# Altium PCB VESC_JLC.PcbDoc (part 1 of 3)
Units mm, origin at the board's own origin, x right, y up, seen from the top; angles counter-clockwise.
Board outline 74.1 x 118 mm, 2 copper layers (Component Side, Bottom Layer), stack 1.571 mm thick; 178 components, 173 nets, 901 pads, 567 vias.
Unrouted connection lines stored in the file: 10.
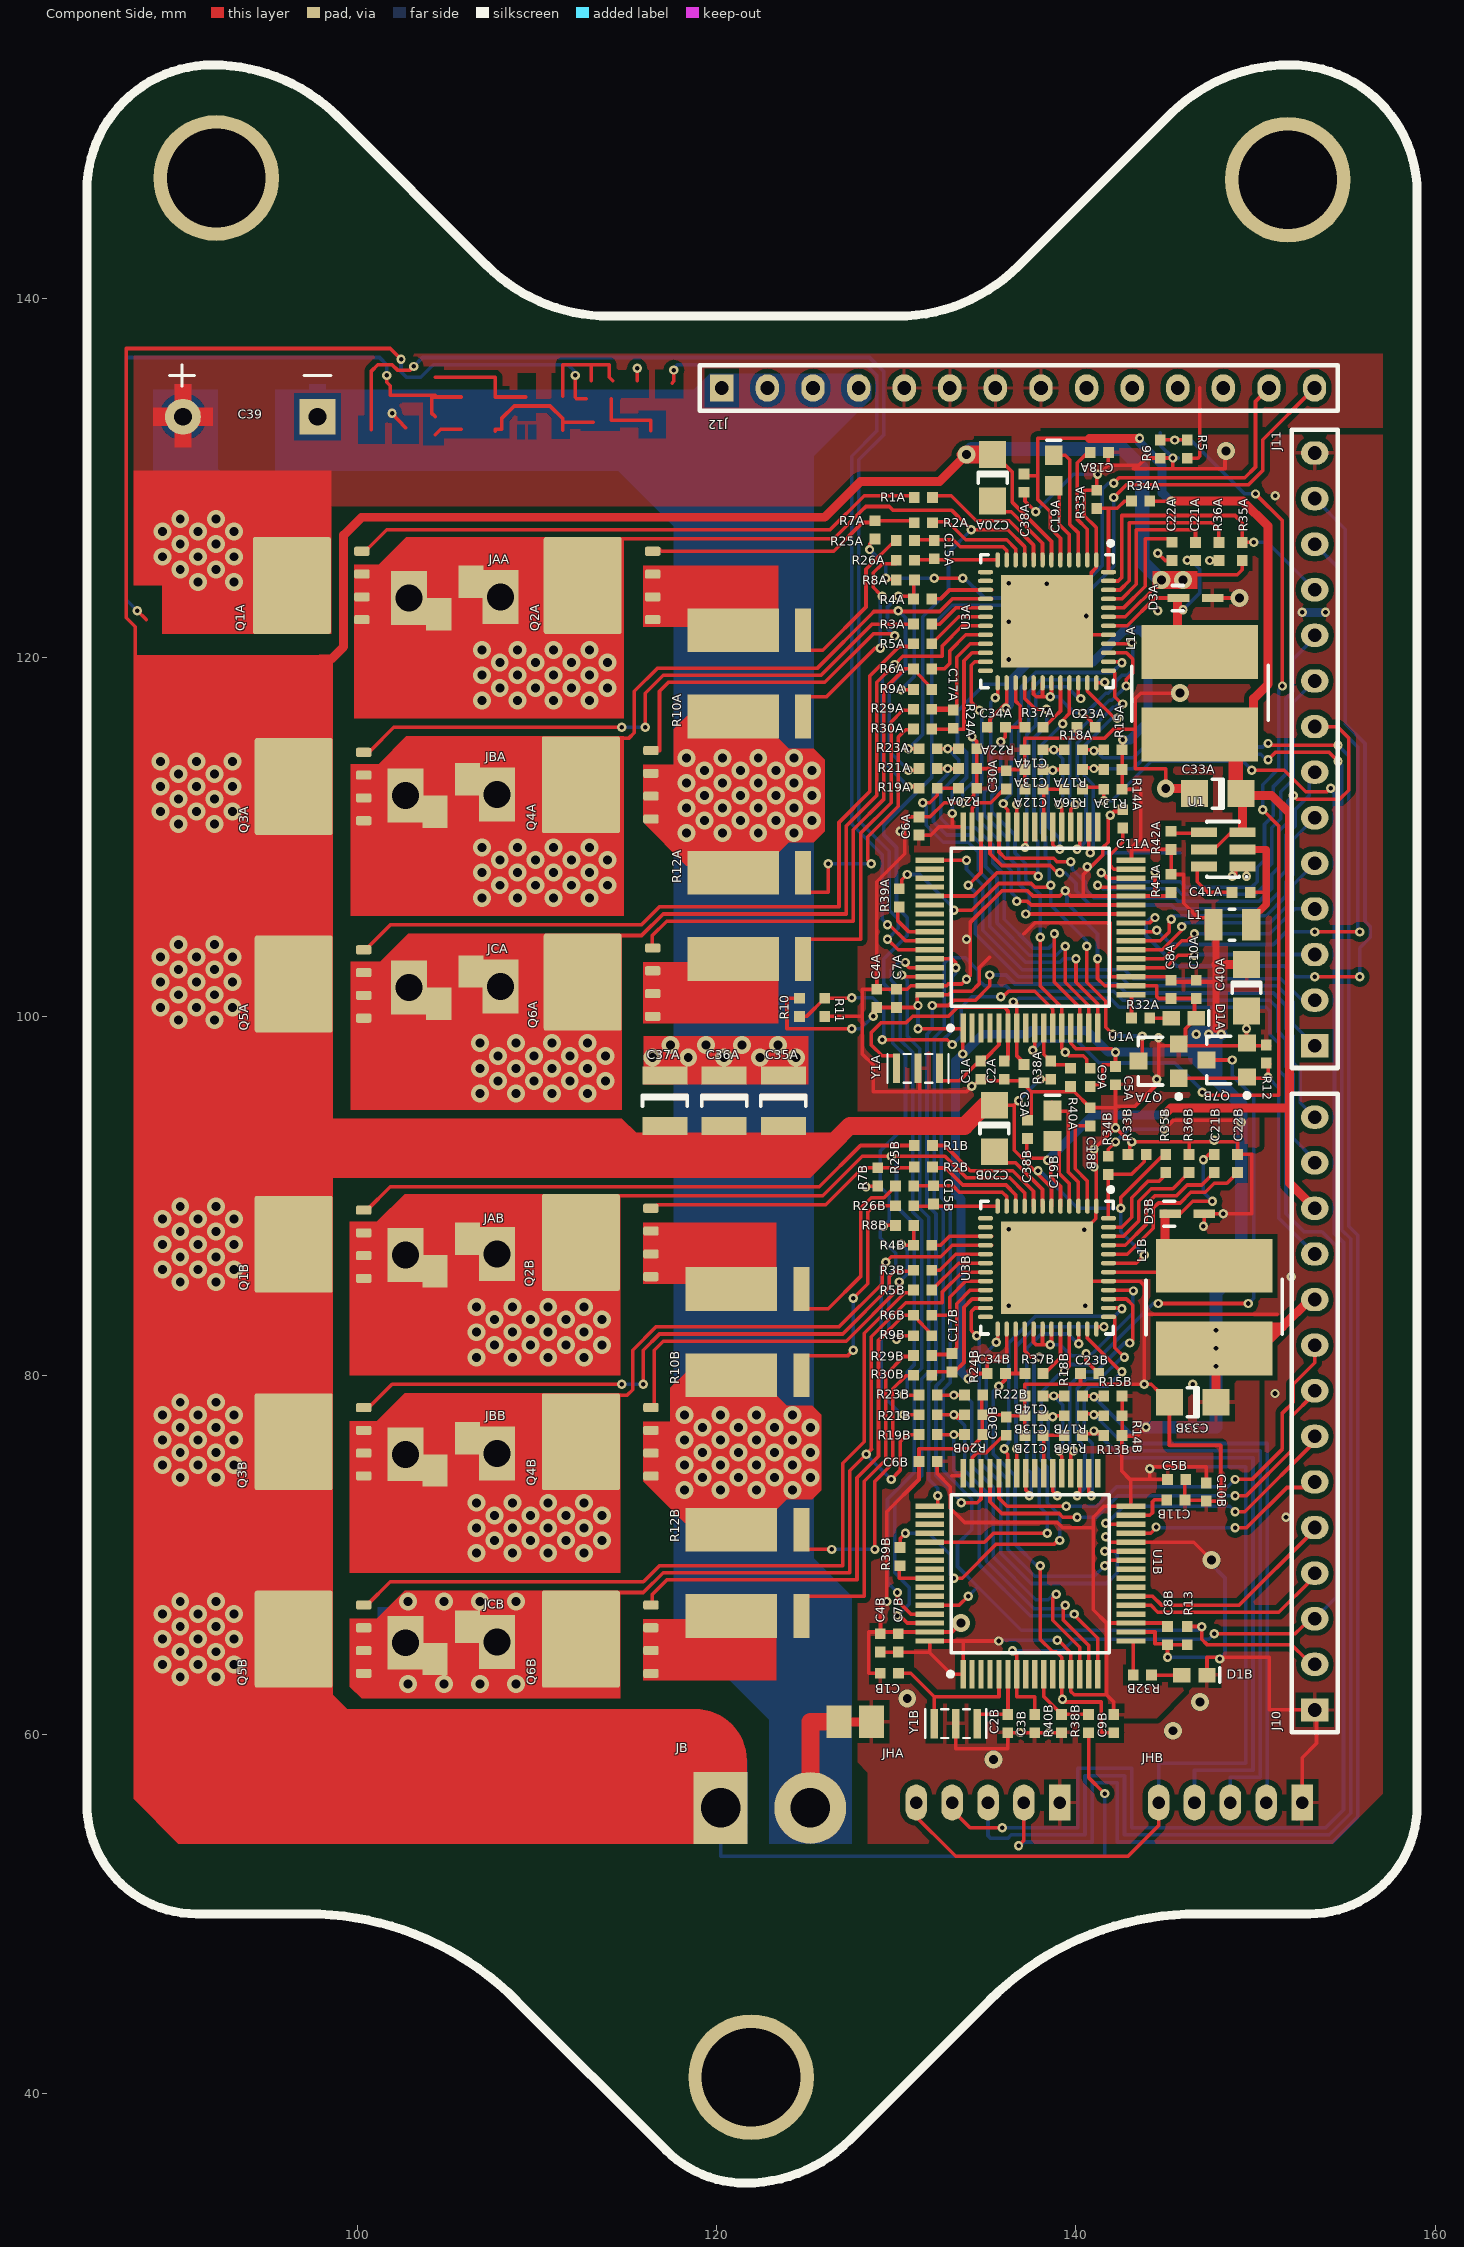
[diagram p0: Component Side view]
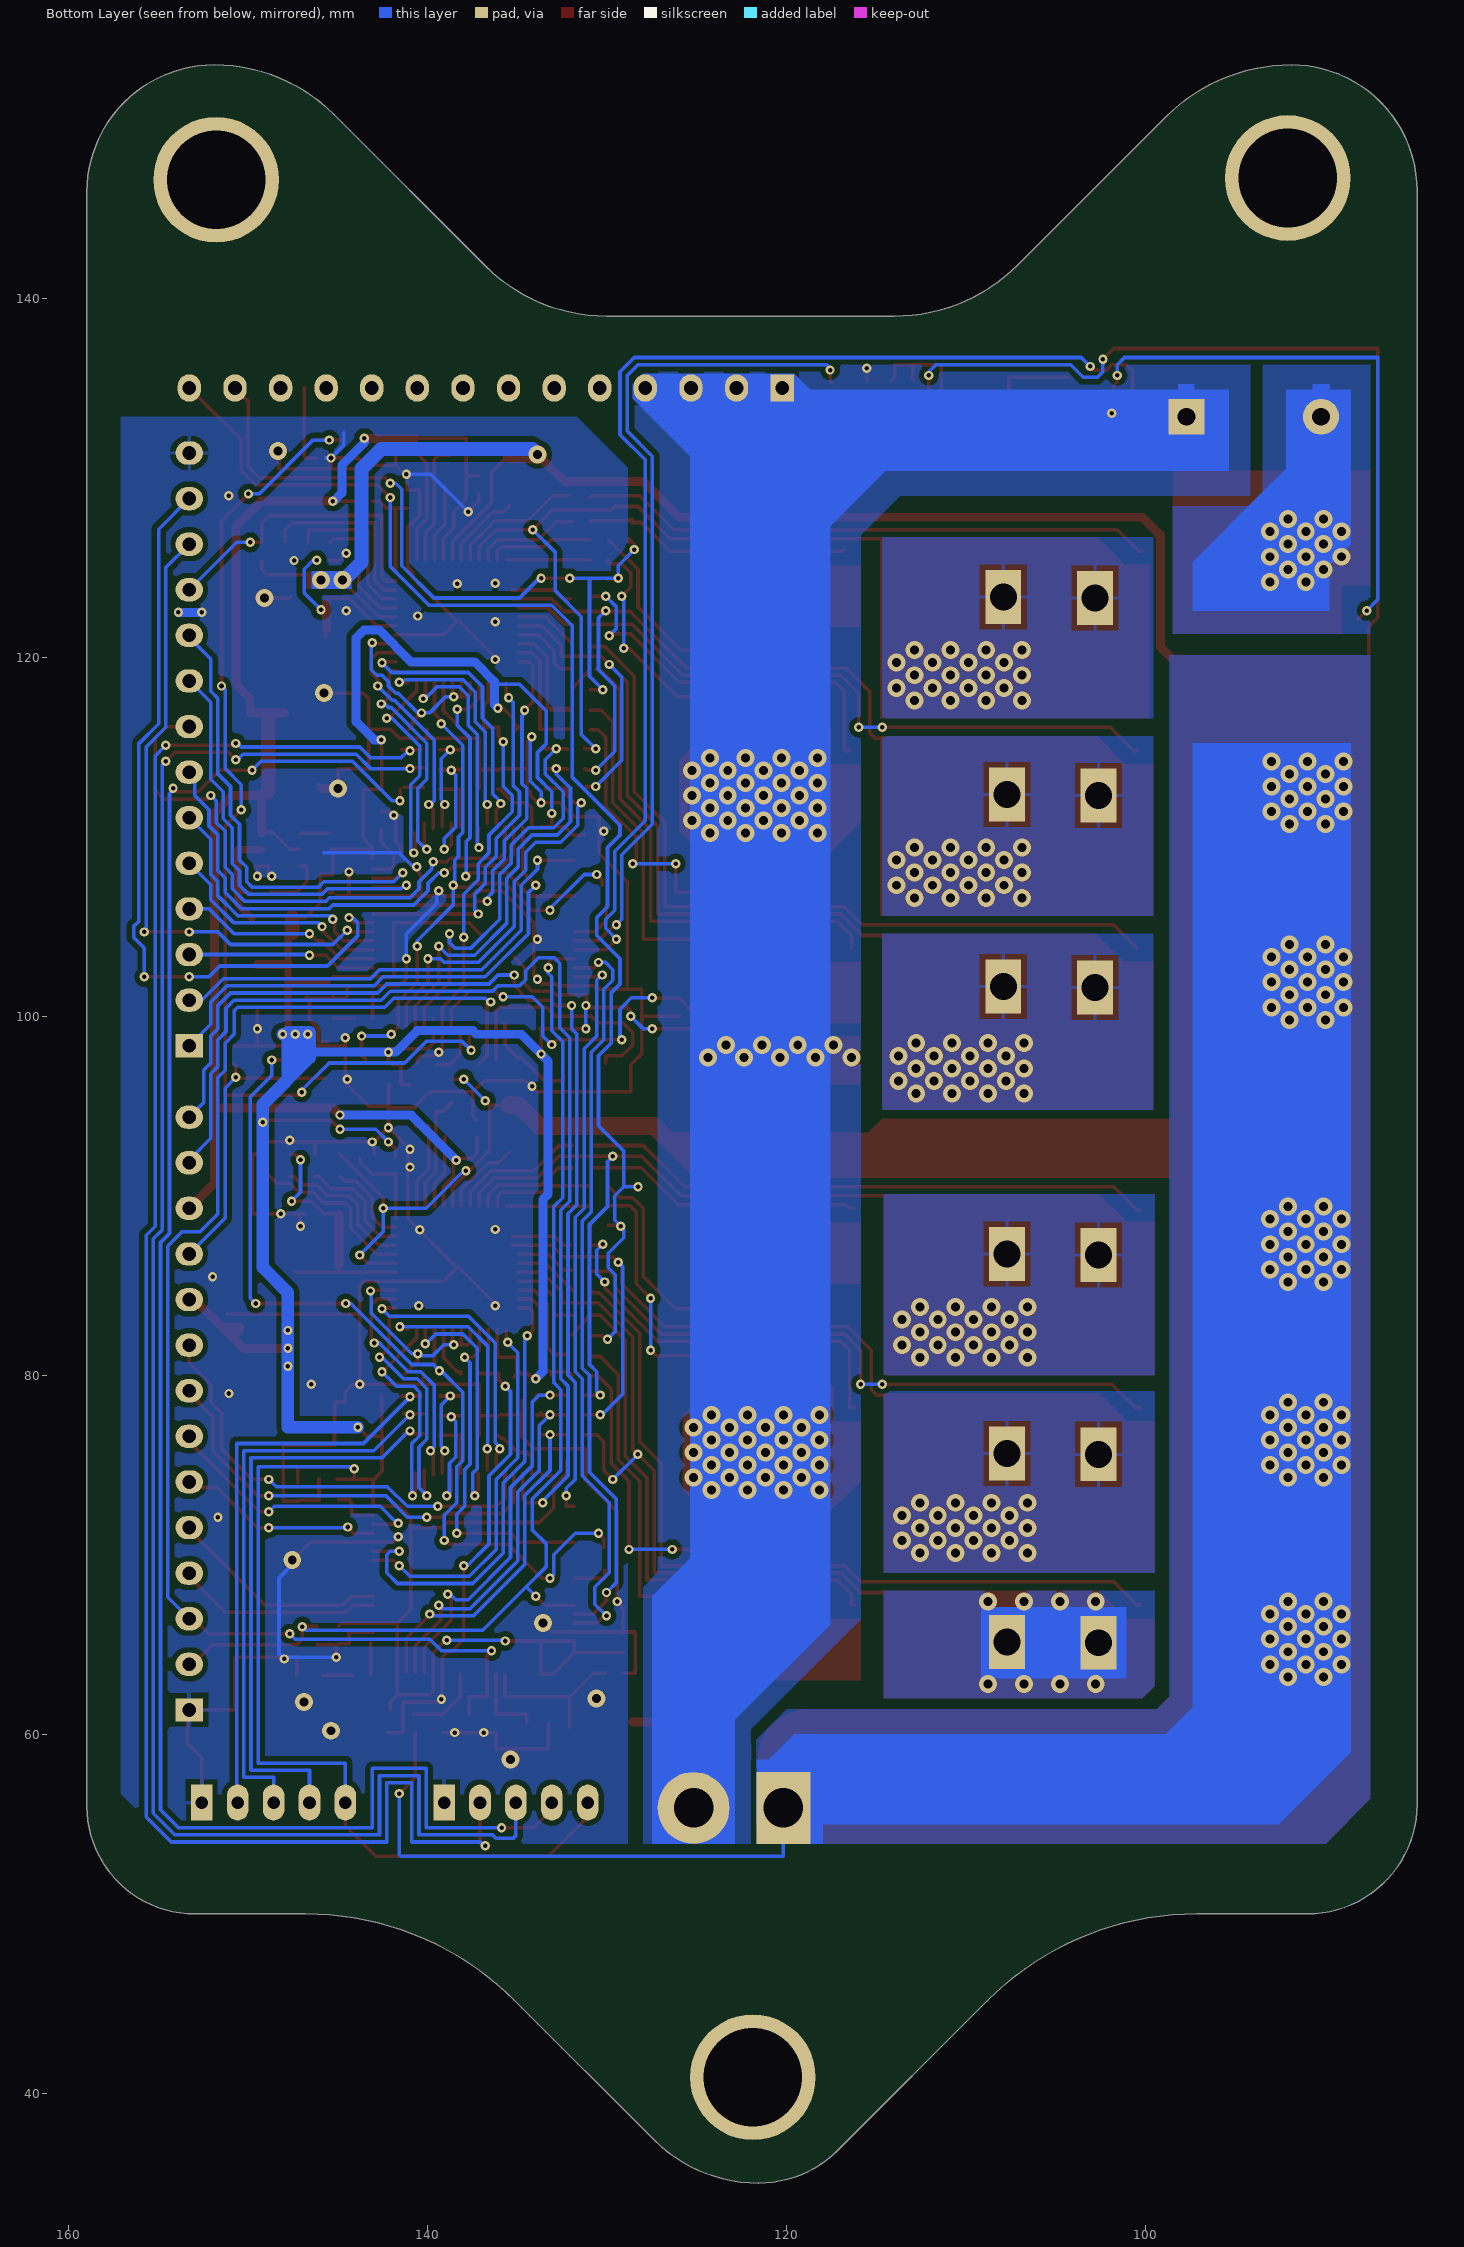
[diagram p1: Bottom Layer view, seen from below]

## Layer stack, top to bottom
Top Solder: solder mask 0.0102, Solder Resist, Dk 3.5
Component Side: signal copper 0.0356
Dielectric 1: core 1.5, FR-4, Dk 4.2
Bottom Layer: signal copper 0.0356
Solder Side: solder mask 0.0102, Solder Resist, Dk 3.5

## Board outline
159,56 159,145.9 ccw(c151.9,145.9) 151.9,153 ccw(c151.9,143.585) 145.242,150.242 136.809,141.809 cw(c130.027,148.591) 130.027,139 114.031,139 cw(c114.031,148.733) 107.149,141.851 98.899,150.101 ccw(c91.9,143.103) 91.9,153 ccw(c91.9,146) 84.9,146 84.9,56.1 ccw(c91,56.1) 91,50 97.172,50 cw(c97.172,33.516) 108.828,45.172 117.172,36.828 ccw(c121.586,41.243) 121.586,35 ccw(c121.586,43.243) 127.414,37.414 135.172,45.172 cw(c146.828,33.515) 146.828,50 153,50 ccw(c153,56)

## Design rules (kind name [scope] priority, off if disabled: settings)
Clearance Clearance_Poly [InPolygon And Not IsPad] p1: gap=0.3 ignorepadtopadclearanceinfootprint=FALSE except(0: Arc-Hole Track-Hole SMDPad-Hole THPad-Hole Via-Hole Fill-Hole Poly-Hole Region-Hole Text-Hole)
Clearance [All] p2: gap=0.152 ignorepadtopadclearanceinfootprint=FALSE except(0: Arc-Hole Track-Hole SMDPad-Hole THPad-Hole Via-Hole Fill-Hole Poly-Hole Region-Hole Text-Hole)
DiffPairsRouting [All] p1: maxlimit=0.305 minlimit=0.152 mostfreqgap=0.152 toplayer_minwidth=0.076 toplayer_maxwidth=0.305 toplayer_prefwidth=0.152 bottomlayer_minwidth=0.076 bottomlayer_maxwidth=0.305 bottomlayer_prefwidth=0.152 maxuncoupledlength=12.7
HoleSize [All] p1: absolutevalues=TRUE maxlimit=10 minlimit=0.025 maxpercent=80.000 minpercent=20.000
MatchedLengths USBC_ADAPTER_USB2 [InDifferentialPair('USBC_D')] p1: tolerance=1.5 checknetsindiffpair=FALSE checkdiffpairvsdiffpair=TRUE checkxsignals=TRUE checkothers=TRUE
MatchedLengths USBC_ADAPTER_DP [InNetClass('SMALL_SIGNAL_DP')] p2: tolerance=1.5 checknetsindiffpair=FALSE checkdiffpairvsdiffpair=TRUE checkxsignals=TRUE checkothers=TRUE
MatchedLengths USBC_ADAPTER_USB3 [InNetClass('SMALL_SIGNAL_USBC')] p3: tolerance=1.5 checknetsindiffpair=FALSE checkdiffpairvsdiffpair=TRUE checkxsignals=TRUE checkothers=TRUE
MatchedLengths FLEX_ADAPTER_MIPI_A [InNetClass('SMALL_SIGNAL_MIPI_A')] p4: tolerance=0.508 checknetsindiffpair=FALSE checkdiffpairvsdiffpair=TRUE checkxsignals=TRUE checkothers=TRUE
MatchedLengths FLEX_ADAPTER_MIPI_B [InNetClass('SMALL_SIGNAL_MIPI_B')] p5: tolerance=0.508 checknetsindiffpair=FALSE checkdiffpairvsdiffpair=TRUE checkxsignals=TRUE checkothers=TRUE
MatchedLengths FLEX_ADAPTER_MIPI_C [InNetClass('SMALL_SIGNAL_MIPI_C')] p6: tolerance=0.508 checknetsindiffpair=FALSE checkdiffpairvsdiffpair=TRUE checkxsignals=TRUE checkothers=TRUE
MatchedLengths DISPLAY_BOARD_USB2_AUD [InNetClass('SMALL_SIGNAL_USB2_AUD')] p7: tolerance=1.27 checknetsindiffpair=FALSE checkdiffpairvsdiffpair=TRUE checkxsignals=TRUE checkothers=TRUE
MatchedLengths DISPLAY_BOARD_USB2_MCU [InNetClass('SMALL_SIGNAL_USB2_MCU')] p8: tolerance=1.27 checknetsindiffpair=FALSE checkdiffpairvsdiffpair=TRUE checkxsignals=TRUE checkothers=TRUE
MatchedLengths DISPLAY_BOARD_USB2_PORT1 [InNetClass('SMALL_SIGNAL_USB2_PORT1')] p9: tolerance=1.27 checknetsindiffpair=FALSE checkdiffpairvsdiffpair=TRUE checkxsignals=TRUE checkothers=TRUE
MatchedLengths DISPLAY_BOARD_USB2_PORT2 [InNetClass('SMALL_SIGNAL_USB2_PORT2')] p10: tolerance=1.27 checknetsindiffpair=FALSE checkdiffpairvsdiffpair=TRUE checkxsignals=TRUE checkothers=TRUE
MatchedLengths DISPLAY_BOARD_MIPI_11 [InNetClass('SMALL_SIGNAL_MIPI11')] p11: tolerance=1.27 checknetsindiffpair=FALSE checkdiffpairvsdiffpair=TRUE checkxsignals=TRUE checkothers=TRUE
MatchedLengths DISPLAY_BOARD_MIPI_00 [InNetClass('SMALL_SIGNAL_MIPI00')] p12: tolerance=1.27 checknetsindiffpair=FALSE checkdiffpairvsdiffpair=TRUE checkxsignals=TRUE checkothers=TRUE
MatchedLengths DISPLAY_BOARD_MIPI_01 [InNetClass('SMALL_SIGNAL_MIPI01')] p13: tolerance=1.27 checknetsindiffpair=FALSE checkdiffpairvsdiffpair=TRUE checkxsignals=TRUE checkothers=TRUE
MatchedLengths DISPLAY_BOARD_MIPI_10 [InNetClass('SMALL_SIGNAL_MIPI10')] p14: tolerance=1.27 checknetsindiffpair=FALSE checkdiffpairvsdiffpair=TRUE checkxsignals=TRUE checkothers=TRUE
MatchedLengths DISPLAY_BOARD_USB2_UP [InNetClass('SMALL_SIGNAL_USB2_UP')] p15: tolerance=1.27 checknetsindiffpair=FALSE checkdiffpairvsdiffpair=TRUE checkxsignals=TRUE checkothers=TRUE
MinimumSolderMaskSliver [All] p1: minsoldermaskwidth=0.051
NetAntennae [All] p1 off: netantennaetolerance=0
PolygonConnect [Not IsVia vs Not IsVia] p1: connectstyle=Relief reliefconductorwidth=0.2 reliefentries=4 polygonreliefangle="90 Angle" airgapwidth=0.3
PolygonConnect PolygonConnect_Via [IsVia vs IsVia] p2: connectstyle=Direct reliefconductorwidth=0.254 reliefentries=4 polygonreliefangle="90 Angle" airgapwidth=0.152
RoutingCorners [All] p1: cornerstyle=Round minsetback=2.54 maxsetback=2.54
RoutingVias [All] p1: holewidth=0.152 width=0.279 viastyle="Through Hole" minholewidth=0.152 minwidth=0.279 maxholewidth=0.305 maxwidth=0.61
ShortCircuit [Not IsPad vs Not IsPad] p1: allowed=TRUE
SilkToSilkClearance [All] p1 off: silktosilkclearance=0.102
SilkToSolderMaskClearance [IsPad] p1 off: minsilkscreentomaskgap=0.102 clearancetoexposedcopper=TRUE
SolderMaskExpansion [All] p1: expansion=0.051
Width [All] p1: maxlimit=2.54 minlimit=0.127 preferedwidth=0.152
22 further rules are at their usual default settings.

## Components (designator, comment, footprint, x,y, rotation, side; value= is the part's Value field where it differs from the comment)
C1A "GCM1555C1H180JA16D" "CAP 0402" 134.7,97 r270 top value=18pF
C1B "GCM1555C1H180JA16D" "CAP 0402" 129.6,63.4 r180 top value=18pF
C2A "GCM1555C1H180JA16D" "CAP 0402" 136,97 r270 top value=18pF
C2B "GCM1555C1H180JA16D" "CAP 0402" 136.2,60.6 r270 top value=18pF
C3A "GCM155R71E103JA37D" "CAP 0402" 137.1,96.8 r270 top value=10nF
C3B "C0402C104K3RACTU" "CAP 0402" 137.7,60.6 r270 top value=100nF
C4A "GRM155C81C225ME15D" "CAP 0402" 128.9,101 r90 top value=2.2uF
C4B "GRM155C81C225ME15D" "CAP 0402" 129.1,65.092 r90 top value=2.2uF
C5A "GRM155C81C225ME15D" "CAP 0402" 142.2,96.7 r270 top value=2.2uF
C5B "GRM155C81C225ME15D" "CAP 0402" 145.6,74.2 r0 top value=2.2uF
C6A "GRM155C81C225ME15D" "CAP 0402" 131.26,110.6 r90 top value=2.2uF
C6B "GRM155C81C225ME15D" "CAP 0402" 131.76,75.2 r180 top value=2.2uF
C7A "GRM155C81C225ME15D" "CAP 0402" 130,101 r90 top value=2.2uF
C7B "GRM155C81C225ME15D" "CAP 0402" 130.1,65.092 r90 top value=2.2uF
C8A "GRM155C81C225ME15D" "CAP 0402" 145.3,101.5 r270 top value=2.2uF
C8B "GRM155C81C225ME15D" "CAP 0402" 145.1,65.5 r270 top value=2.2uF
C9A "GRM155C81C225ME15D" "CAP 0402" 140.8,96.6 r90 top value=2.2uF
C9B "GRM155C81C225ME15D" "CAP 0402" 142.1,60.6 r270 top value=2.2uF
C10A "GRM155C81C225ME15D" "CAP 0402" 146.7,101.5 r270 top value=2.2uF
C10B "GRM155C81C225ME15D" "CAP 0402" 147.26,73.5 r270 top value=2.2uF
C11A "GRM155C81C225ME15D" "CAP 0402" 142.6,111 r90 top value=2.2uF
C11B "GRM155C81C225ME15D" "CAP 0402" 145.56,73.05 r0 top value=2.2uF
C12A "GCM155R72A222KA37D" "CAP 0402" 137.66,112.65 r0 top value=2.2nF
C12B "GCM155R72A222KA37D" "CAP 0402" 137.66,76.65 r0 top value=2.2nF
C13A "GCM155R72A222KA37D" "CAP 0402" 137.66,113.75 r0 top value=2.2nF
C13B "GCM155R72A222KA37D" "CAP 0402" 137.66,77.75 r0 top value=2.2nF
C14A "GCM155R72A222KA37D" "CAP 0402" 137.66,114.85 r0 top value=2.2nF
C14B "GCM155R72A222KA37D" "CAP 0402" 137.66,78.85 r0 top value=2.2nF
C15A "GCM155R72A222KA37D" "CAP 0402" 132.1,126 r90 top value=2.2nF
C15B "GCM155R72A222KA37D" "CAP 0402" 132.06,90.05 r90 top value=2.2nF
C17A "GCM155R72A222KA37D" "CAP 0402" 133.168,116.55 r90 top value=2.2nF
C17B "GCM155R72A222KA37D" "CAP 0402" 133.1,80.7 r90 top value=2.2nF
C18A "GRM155C81C225ME15D" "CAP 0402" 141.3,131.4 r0 top value=2.2uF
C18B "GRM155C81C225ME15D" "CAP 0402" 140.8,94.4 r90 top value=2.2uF
C19A "C0603C473K1RECAUTO" "CAP 0603" 138.76,130.4 r270 top value=47nF
C19B "C0603C473K1RECAUTO" "CAP 0603" 138.7,93.9 r270 top value=47nF
C20A "GRJ31CR72A105KE11L" "CAP 1206" 135.36,130 r270 top value=1uF
C20B "GRJ31CR72A105KE11L" "CAP 1206" 135.452,93.75 r270 top value=1uF
C21A "GCM155R71E103JA37D" "CAP 0402" 146.66,125.892 r270 top value=10nF
C21B "GCM155R71E103JA37D" "CAP 0402" 147.7,91.8 r90 top value=10nF
C22A "GRM155C81C225ME15D" "CAP 0402" 145.35,125.9 r90 top value=2.2uF
C22B "GRM155C81C225ME15D" "CAP 0402" 149,91.8 r270 top value=2.2uF
C23A "GRM155C81C225ME15D" "CAP 0402" 140.56,116.1 r0 top value=2.2uF
C23B "GRM155C81C225ME15D" "CAP 0402" 140.76,80.1 r0 top value=2.2uF
C30A "GRM155C81C225ME15D" "CAP 0402" 136.11,113.166 r90 top value=2.2uF
C30B "GRM155C81C225ME15D" "CAP 0402" 136.11,77.166 r90 top value=2.2uF
C33A "TMK316AB7106KL-T" "CAP 1206" 147.9,112.4 r180 top value=10uF
C33B "TMK316AB7106KL-T" "CAP 1206" 146.5,78.5 r180 top value=10uF
C34A "GRM155C81C225ME15D" "CAP 0402" 135.56,116.1 r0 top value=2.2uF
C34B "GRM155C81C225ME15D" "CAP 0402" 135.56,80.1 r0 top value=2.2uF
C35A "CGA6M3X7S2A475M200AB" "CAP 1210" 123.7,95.3 r270 top value=4.7uF
C36A "CGA6M3X7S2A475M200AB" "CAP 1210" 120.4,95.3 r270 top value=4.7uF
C37A "CGA6M3X7S2A475M200AB" "CAP 1210" 117.1,95.3 r270 top value=4.7uF
C38A "GRM155C81C225ME15D" "CAP 0402" 137.1,129.7 r270 top value=2.2uF
C38B "GRM155C81C225ME15D" "CAP 0402" 137.3,93.7 r90 top value=2.2uF
C39 "108CKS100MRY" "CAP 7.5mm Bent" 94,133.4 r180 top value=1000uF
C40A "TMK316AB7106KL-T" "CAP 1206" 149.5,101.6 r270 top value=10uF
C41A "C0402C104K3RACTU" "CAP 0402" 149.2,106.9 r180 top value=100nF
D1A "LTST-C190KRKT" "LED 0603" 146,99.9 r0 top
D1B "LTST-C190KRKT" "LED 0603" 146.6,63.3 r0 top
D3A "NSR02100HT1G" SOD-323/SC76 146.66,123.3 r180 top
D3B "NSR02100HT1G" SOD-323/SC76 146.2,89 r180 top
J10 "HEADER_14P1" HEADER_14P1_FEMALE_TH 153.3,77.9 r90 top
J11 "HEADER_14P1" HEADER_14P1_FEMALE_TH 153.3,114.9 r90 top
J12 "HEADER_14P1" HEADER_14P1_FEMALE_TH 136.81,135 r0 top
JAA "63849-1" 63849-1 105.4,123.3 r0 top
JAB "63849-1" 63849-1 105.2,86.7 r0 top
JB "XT30_S" "XT30 SOCKET" 122.7,55.6 r180 top
JBA "63849-1" 63849-1 105.2,112.3 r0 top
JBB "63849-1" 63849-1 105.2,75.6 r0 top
JCA "63849-1" 63849-1 105.4,101.6 r0 top
JCB "63849-1" 63849-1 105.2,65.1 r0 top
JHA "B05B-PASK" B05B-PASK 135.1,56.2 r180 top
JHB "B05B-PASK" B05B-PASK 148.6,56.2 r180 top
L1 "LQM2HPN4R7MG0L" "IND 1008" 148.7,105.1 r0 top value=4.7uH
L1A "SDE0805A-331K" SDE0805A 146.9,118 r270 top value=330uH
L1B "SDE0805A-331K" SDE0805A 147.7,83.8 r270 top value=330uH
Q1A "CSD19531Q5A" VSONP-8 97.4,124 r180 top value=100V
Q1B "CSD19531Q5A" VSONP-8 97.5,87.3 r180 top value=100V
Q2A "CSD19531Q5A" VSONP-8 113.6,124 r180 top value=100V
Q2B "CSD19531Q5A" VSONP-8 113.5,87.4 r180 top value=100V
Q3A "CSD19531Q5A" VSONP-8 97.5,112.8 r180 top value=100V
Q3B "CSD19531Q5A" VSONP-8 97.5,76.3 r180 top value=100V
Q4A "CSD19531Q5A" VSONP-8 113.5,112.9 r180 top value=100V
Q4B "CSD19531Q5A" VSONP-8 113.5,76.3 r180 top value=100V
Q5A "CSD19531Q5A" VSONP-8 97.5,101.8 r180 top value=100V
Q5B "CSD19531Q5A" VSONP-8 97.5,65.3 r180 top value=100V
Q6A "CSD19531Q5A" VSONP-8 113.6,101.9 r180 top value=100V
Q6B "CSD19531Q5A" VSONP-8 113.5,65.3 r180 top value=100V
Q7A "2N7002-7-F" SOT-23-3 144.6,97.5 r90 top
Q7B "2N7002-7-F" SOT-23-3 148.4,97.565 r90 top
R1A "ERJ-PA3J4R7V" "RES 0402" 131.5,128.9 r180 top value=4.7R
R1B "ERJ-PA3J4R7V" "RES 0402" 131.5,92.8 r180 top value=4.7R
R2A "ERJ-PA3J4R7V" "RES 0402" 131.5,127.5 r180 top value=4.7R
R2B "ERJ-PA3J4R7V" "RES 0402" 131.5,91.6 r180 top value=4.7R
R3A "ERJ-PA3J4R7V" "RES 0402" 131.46,121.85 r180 top value=4.7R
R3B "ERJ-PA3J4R7V" "RES 0402" 131.46,85.85 r180 top value=4.7R
R4A "ERJ-PA3J4R7V" "RES 0402" 131.46,123.25 r180 top value=4.7R
R4B "ERJ-PA3J4R7V" "RES 0402" 131.46,87.25 r180 top value=4.7R
R5 "ERJ-2RKF3902X" "RES 0402" 146.2,131.6 r270 top value=39k
R5A "ERJ-PA3J4R7V" "RES 0402" 131.46,120.75 r180 top value=4.7R
R5B "ERJ-PA3J4R7V" "RES 0402" 131.46,84.75 r180 top value=4.7R
R6 "ERJ-2RKF2201X" "RES 0402" 144.7,131.6 r90 top value=2.2k
R6A "ERJ-PA3J4R7V" "RES 0402" 131.46,119.35 r180 top value=4.7R
R6B "ERJ-PA3J4R7V" "RES 0402" 131.46,83.35 r180 top value=4.7R
R7A "ERJ-2RKF3902X" "RES 0402" 128.8,127.1 r90 top value=39k
R7B "ERJ-2RKF3902X" "RES 0402" 128.952,91.05 r90 top value=39k
R8A "ERJ-2RKF3902X" "RES 0402" 130.5,124.3 r0 top value=39k
R8B "ERJ-2RKF3902X" "RES 0402" 130.46,88.35 r0 top value=39k
R9A "ERJ-2RKF3902X" "RES 0402" 131.46,118.2 r0 top value=39k
R9B "ERJ-2RKF3902X" "RES 0402" 131.46,82.2 r0 top value=39k
R10 "ERT-J0EG202GM" "RES 0402" 124.6,100.5 r90 top value=2k
R10A "WSL27262L000FEB" WSL2726 121.8,119.1 r0 top value=1m
R10B "WSL27262L000FEB" WSL2726 121.7,82.4 r0 top value=1m
R11 "ERJ-2RKF2201X" "RES 0402" 126,100.5 r90 top value=2.2k
R12 "ERJ-2RKF2201X" "RES 0402" 150.6,97.9 r270 top value=2.2k
R12A "WSL27262L000FEB" WSL2726 121.8,105.6 r0 top value=1m
R12B "WSL27262L000FEB" WSL2726 121.7,69 r0 top value=1m
R13 "ERJ-2RKF1002X" "RES 0402" 146.2,65.5 r90 top value=10k
R13A "ERJ-2RKF2201X" "RES 0402" 142.06,112.65 r0 top value=2.2k
R13B "ERJ-2RKF2201X" "RES 0402" 142.06,76.65 r0 top value=2.2k
R14A "ERJ-2RKF2201X" "RES 0402" 142.06,113.75 r0 top value=2.2k
R14B "ERJ-2RKF2201X" "RES 0402" 142.06,77.75 r0 top value=2.2k
R15A "ERJ-2RKF2201X" "RES 0402" 142.06,114.85 r0 top value=2.2k
R15B "ERJ-2RKF2201X" "RES 0402" 142.06,78.85 r0 top value=2.2k
R16A "ERJ-2RKF1002X" "RES 0402" 139.86,112.65 r180 top value=10k
R16B "ERJ-2RKF1002X" "RES 0402" 139.86,76.65 r180 top value=10k
R17A "ERJ-2RKF1002X" "RES 0402" 139.86,113.75 r180 top value=10k
R17B "ERJ-2RKF1002X" "RES 0402" 139.86,77.75 r180 top value=10k
R18A "ERJ-2RKF1002X" "RES 0402" 139.86,114.85 r180 top value=10k
R18B "ERJ-2RKF1002X" "RES 0402" 139.86,78.85 r180 top value=10k
R19A "ERJ-2RKF3902X" "RES 0402" 131.76,112.7 r180 top value=39k
R19B "ERJ-2RKF3902X" "RES 0402" 131.76,76.7 r180 top value=39k
R20A "ERJ-2RKF2201X" "RES 0402" 133.96,112.7 r180 top value=2.2k
R20B "ERJ-2RKF2201X" "RES 0402" 134.3,76.7 r180 top value=2.2k
R21A "ERJ-2RKF3902X" "RES 0402" 131.76,113.8 r180 top value=39k
R21B "ERJ-2RKF3902X" "RES 0402" 131.76,77.8 r180 top value=39k
R22A "ERJ-2RKF2201X" "RES 0402" 133.96,113.8 r180 top value=2.2k
R22B "ERJ-2RKF2201X" "RES 0402" 134.3,77.8 r180 top value=2.2k
R23A "ERJ-2RKF3902X" "RES 0402" 131.76,114.9 r180 top value=39k
R23B "ERJ-2RKF3902X" "RES 0402" 131.76,78.9 r180 top value=39k
R24A "ERJ-2RKF2201X" "RES 0402" 133.96,114.9 r180 top value=2.2k
R24B "ERJ-2RKF2201X" "RES 0402" 134.3,78.9 r180 top value=2.2k
R25A "ERJ-2RKF1000X" "RES 0402" 130.5,126.5 r180 top value=100R
R25B "ERJ-2RKF1000X" "RES 0402" 130.46,90.55 r180 top value=100R
R26A "ERJ-2RKF1000X" "RES 0402" 130.5,125.4 r180 top value=100R
R26B "ERJ-2RKF1000X" "RES 0402" 130.46,89.45 r180 top value=100R
R29A "ERJ-2RKF1000X" "RES 0402" 131.46,117.1 r180 top value=100R
R29B "ERJ-2RKF1000X" "RES 0402" 131.46,81.1 r180 top value=100R
R30A "ERJ-2RKF1000X" "RES 0402" 131.46,116 r180 top value=100R
R30B "ERJ-2RKF1000X" "RES 0402" 131.46,80 r180 top value=100R
R32A "ERJ-2RKF1000X" "RES 0402" 143.6,99.9 r180 top value=100R
R32B "ERJ-2RKF1000X" "RES 0402" 143.7,63.3 r180 top value=100R
R33A "ERJ-2RKF3162X" "RES 0402" 141.16,128.8 r270 top value=31.6k
R33B "ERJ-2RKF3162X" "RES 0402" 143.4,92.3 r0 top value=31.6k
R34A "ERJ-2RKF1002X" "RES 0402" 143.6,128.7 r0 top value=10k
R34B "ERJ-2RKF1002X" "RES 0402" 141.8,91.7 r90 top value=10k
R35A "ERJ-2RKF2743X" "RES 0402" 149.26,125.892 r270 top value=274k
R35B "ERJ-2RKF2743X" "RES 0402" 145,91.8 r90 top value=274k
R36A "ERJ-2RKF1333X" "RES 0402" 147.96,125.892 r270 top value=133k
R36B "ERJ-2RKF1333X" "RES 0402" 146.3,91.8 r90 top value=133k
R37A "ERJ-2RKF4702X" "RES 0402" 137.66,116.1 r180 top value=47k
R37B "ERJ-2RKF4702X" "RES 0402" 137.66,80.1 r180 top value=47k
R38A "ERJ-2RKF3902X" "RES 0402" 138.6,97 r270 top value=39k
R38B "ERJ-2RKF3902X" "RES 0402" 140.7,60.6 r270 top value=39k
R39A "ERJ-2RKF2201X" "RES 0402" 130.16,106.6 r270 top value=2.2k
R39B "ERJ-2RKF2201X" "RES 0402" 130.2,69.9 r270 top value=2.2k
R40A "ERJ-2RKF2201X" "RES 0402" 139.7,96.6 r90 top value=2.2k
R40B "ERJ-2RKF2201X" "RES 0402" 139.2,60.6 r90 top value=2.2k
R41A "ERJ-2RKF1002X" "RES 0402" 145.3,107.4 r90 top value=10k
R42A "ERJ-2RKF3651X" "RES 0402" 145.3,109.8 r90 top value=3.65k
U1 "TPS561201" SOT-23-6 148.2,109.3 r90 top
U1A "STM32F405RGT6" "QFP-64 - P0.5MM" 137.46,104.95 r90 top
U1B "STM32F405RGT6" "QFP-64 - P0.5MM" 137.46,68.95 r90 top
U3A "DRV8353RH" "QFN-48 - P0.5MM" 138.385,122 r270 top
U3B "DRV8353RH" "QFN-48 - P0.5MM" 138.385,86 r270 top
Y1A "CSTNE8M00G550000R0" "MuRata CSTN" 131.2,97.1 r0 top value=8MHz
Y1B "CSTNE8M00G550000R0" "MuRata CSTN" 133.3,60.6 r180 top value=8MHz

## Footprints (in the part's own frame and the unit in brackets; to place one, negate y for a bottom-side part, rotate by r counter-clockwise, add the part's x,y. Pads: shape width x height; smd on the part's side, far side on the other; paste and mask are expansions set on the pad)
63849-1 [mm] "SPADE CONNECTOR PCB MOUNT"
  rect 2x3 hole 1.5: 1(-2.55,0) 1(2.55,0.05)
  rect 1.4x1.8 smd: 1(-0.9,-0.9) 1(0.9,0.9)
  body extent -3.96,-1.54 3.96,1.54, height 10.3
B05B-PASK [mm] "JST 5 PIN PA CONNECTOR LOCKING"
  rect 1.2x2 hole 0.7: 1(-4,0)
  oval 1.2x2 hole 0.7: 2(-2,0) 3(0,0) 4(2,0) 5(4,0)
  body extent -6,-2.2 6,3.1, height 7.85
"CAP 7.5mm Bent" [mm] "Electrolytic Capacitor, 7.5mm Lead Spacing, 0.6mm Holes"
  rect 2x2 hole 1: 1(-3.75,0)
  round 2 hole 1: 2(3.75,0)
  body extent -8,-45 8,0.61, height 18
"CAP 0402" [mm] "Chip Capacitor; Body 1.0 x 0.5 mm (LxW typ)"
  rect 0.6x0.6 smd: 1(-0.508,0) 2(0.508,0)
  body extent -0.5,-0.3 0.5,0.3, height 0.2
"CAP 0603" [mm] "Chip Capacitor; Body 1.6 x 0.8 mm (LxW typ)"
  rect 1.1x1 smd: 1(-0.85,0) 2(0.85,0)
  silkscreen extent -1.7,-0.4 -1.7,0.4, body extent -1.14,-0.51 1.14,0.51, height 1
"CAP 1206" [mm] "Chip Capacitor; Body 3.2 x 1.6 mm (LxW typ)"
  rect 1.5x1.5 smd: 1(-1.295,0) 2(1.295,0)
  silkscreen extent -0.3,-0.8 0.3,0.8, body extent -1.6,-0.8 1.6,0.8, height 1
"CAP 1210" [mm] "Chip Capacitor; Body 3.2 x 2.5 mm (LxW typ)"
  rect 1x2.5 smd: 1(-1.4,0) 2(1.4,0)
  silkscreen extent -0.3,-1.25 0.3,1.25, body extent -1.6,-1.25 1.6,1.25, height 0.92
HEADER_14P1_FEMALE_TH [mm] "Through Hole Header 14 Pin 1 Row 2.54mm"
  rect 1.3x1.524 hole 0.762: 1(-16.54,0)
  oval 1.3x1.524 hole 0.762: 2(-14,0) 3(-11.46,0) 4(-8.92,0) 5(-6.38,0) 6(-3.84,0) 7(-1.3,0) 8(1.24,0) 9(3.78,0) 10(6.32,0) 11(8.86,0) 12(11.4,0) 13(13.94,0) 14(16.48,0)
  silkscreen extent -17.78,-1.27 17.78,1.27, body extent -17.78,-1.27 17.78,1.27, height 8.5
"IND 1008" [mil]
  rect 40x70 smd: 1(-41,0) 2(42,0)
  silkscreen extent -6,-34 6,34, body extent -41,-30 41,30, height 56
"LED 0603" [mm] "Chip Diode; Body 1.6 x 0.8 mm (LxW typ)"
  rect 0.965x0.8 smd: 1(-0.7,0) 2(0.7,0)
  silkscreen extent 1.4,-0.4 1.4,0.4, body extent -0.8,-0.4 0.8,0.4, height 0.35
"MuRata CSTN" [mm] "Crystal Package 4-SMD 3.2x2.5mm"
  rect 0.4x1.65 smd: 1(-1.2,0) 2(0,0) 3(1.2,0)
  silkscreen extent -1.7,-0.8 1.7,0.8, body extent -1.6,-0.65 1.6,0.65, height 0.7
"QFN-48 - P0.5MM" [mm] "QFN; 48 Leads; Body 7 x 7 mm; Pitch 0.5 mm"
  rect 5.15x5.15 smd: 0(0,0)
  oval 0.85x0.25 smd: 1(-3.425,2.75) 2(-3.425,2.25) 3(-3.425,1.75) 4(-3.425,1.25) 5(-3.425,0.75) 6(-3.425,0.25) 7(-3.425,-0.25) 8(-3.425,-0.75) 9(-3.425,-1.25) 10(-3.425,-1.75) 11(-3.425,-2.25) 12(-3.425,-2.75) 25(3.425,-2.75) 26(3.425,-2.25) 27(3.425,-1.75) 28(3.425,-1.25) 29(3.425,-0.75) 30(3.425,-0.25) 31(3.425,0.25) 32(3.425,0.75) 33(3.425,1.25) 34(3.425,1.75) 35(3.425,2.25) 36(3.425,2.75)
  oval 0.25x0.85 smd: 13(-2.75,-3.425) 14(-2.25,-3.425) 15(-1.75,-3.425) 16(-1.25,-3.425) 17(-0.75,-3.425) 18(-0.25,-3.425) 19(0.25,-3.425) 20(0.75,-3.425) 21(1.25,-3.425) 22(1.75,-3.425) 23(2.25,-3.425) 24(2.75,-3.425) 37(2.75,3.425) 38(2.25,3.425) 39(1.75,3.425) 40(1.25,3.425) 41(0.75,3.425) 42(0.25,3.425) 43(-0.25,3.425) 44(-0.75,3.425) 45(-1.25,3.425) 46(-1.75,3.425) 47(-2.25,3.425) 48(-2.75,3.425)
  silkscreen extent -4.47,-3.7 3.7,3.7, body extent -3.51,-3.51 3.51,3.51, height 0.8
"QFP-64 - P0.5MM" [mm] "64-Pin Plastic Quad Flat Pack (TQFP)"
  rect 1.6x0.3 smd: 1(-5.6,3.75) 2(-5.6,3.25) 3(-5.6,2.75) 4(-5.6,2.25) 5(-5.6,1.75) 6(-5.6,1.25) 7(-5.6,0.75) 8(-5.6,0.25) 9(-5.6,-0.25) 10(-5.6,-0.75) 11(-5.6,-1.25) 12(-5.6,-1.75) 13(-5.6,-2.25) 14(-5.6,-2.75) 15(-5.6,-3.25) 16(-5.6,-3.75) 33(5.6,-3.75) 34(5.6,-3.25) 35(5.6,-2.75) 36(5.6,-2.25) 37(5.6,-1.75) 38(5.6,-1.25) 39(5.6,-0.75) 40(5.6,-0.25) 41(5.6,0.25) 42(5.6,0.75) 43(5.6,1.25) 44(5.6,1.75) 45(5.6,2.25) 46(5.6,2.75) 47(5.6,3.25) 48(5.6,3.75)
  rect 0.3x1.6 smd: 17(-3.75,-5.6) 18(-3.25,-5.6) 19(-2.75,-5.6) 20(-2.25,-5.6) 21(-1.75,-5.6) 22(-1.25,-5.6) 23(-0.75,-5.6) 24(-0.25,-5.6) 25(0.25,-5.6) 26(0.75,-5.6) 27(1.25,-5.6) 28(1.75,-5.6) 29(2.25,-5.6) 30(2.75,-5.6) 31(3.25,-5.6) 32(3.75,-5.6) 49(3.75,5.6) 50(3.25,5.6) 51(2.75,5.6) 52(2.25,5.6) 53(1.75,5.6) 54(1.25,5.6) 55(0.75,5.6) 56(0.25,5.6) 57(-0.25,5.6) 58(-0.75,5.6) 59(-1.25,5.6) 60(-1.75,5.6) 61(-2.25,5.6) 62(-2.75,5.6) 63(-3.25,5.6) 64(-3.75,5.6)
  silkscreen extent -5.72,-4.4 4.4,4.57, body extent -6.01,-6.01 6.01,6.01, height 1.55
"RES 0402" [mm] "Body 1.0 x 0.5 mm (LxW typ)"
  rect 0.6x0.6 smd: 1(-0.508,0) 2(0.508,0)
  body extent -0.5,-0.25 0.5,0.25, height 0.35
SDE0805A [mm]
  rect 3x6.5 smd: 1(-2.3,0) 2(2.3,0)
  silkscreen extent -1.55,-3.8 1.55,3.8, body extent -3.89,-3.5 3.89,3.5, height 5
SOD-323/SC76 [mm]
  rect 1.2x0.45 smd: 1(-0.95,0) 2(0.95,0)
  silkscreen extent 0.7,-0.7 1.3,0.7, body extent -1.43,-0.76 1.43,0.74, height 1.08
SOT-23-3 [mm] "SOT-23; 3 Leads; Body 3.0 x 2.5 mm, inc. leads (LxW max)"
  rect 0.95x1 smd: 1(-0.95,-1.125) 2(0.95,-1.125) 3(0,1.125)
  silkscreen extent -2.1,-1.25 1.32,1.13, body extent -1.5,-1.27 1.5,1.28, height 1
SOT-23-6 [mm] "SOT-23-6 Leads; Body 3.1 x 3 mm, inc. leads (LxW max)"
  rect 0.55x1.45 smd: 1(-0.95,-1.075) 2(0,-1.075) 3(0.95,-1.075) 4(0.95,1.075) 5(0,1.071) 6(-0.95,1.075)
  silkscreen extent -1.57,-1.35 1.55,0.9, body extent -1.46,-1.42 1.46,1.42, height 1.09
VSONP-8 [mm] "SON, 8-Leads, Body 5x6mm"
  rrect39% 0.86x0.51 smd paste-0.05 mask-0.05: 1(-2.82,1.905) 2(-2.82,0.635) 3(-2.82,-0.635) 4(-2.82,-1.905) 5(2.82,-1.905) 6(2.82,-0.635) 7(2.82,0.635) 8(2.82,1.905)
  rrect40% 0.25x0.555 on Top Solder: 9(-0.83,2.372) 9(-0.83,-2.372)
  rrect40% 0.25x0.555 on Top Paste: 9(-0.83,2.372) 9(-0.83,-2.372)
  rrect11% 0.95x1.13 on Top Paste: 9(-0.535,1.33) 9(-0.535,0) 9(-0.535,-1.33) 9(0.615,1.33) 9(0.615,0) 9(0.615,-1.33) 9(1.765,-1.33) 9(1.765,0) 9(1.765,1.33)
  rrect3% 3.58x4 on Top Solder: 9(0.75,0)
  rrect5% 4.34x5.4 smd paste-3 mask-3: 9(1.08,0)
  body extent -3.05,-2.55 3.05,2.55, height 1.06
WSL2726 [mm] "Body 7.24 x 3.81 mm (LxW typ)"
  rect 5.1x2.44 smd: 1(-0.9,-2.4) 2(-0.9,2.4)
  rect 0.89x2.44 smd: 1(3,-2.4) 2(3,2.4)
  body extent -3.3,-3.45 3.3,3.45, height 3.58
"XT30 SOCKET" [mm] "XT30 SOCKET"
  round 4 hole 2.2: 1(-2.5,-0.3)
  rect 3x4 hole 2.2: 2(2.5,-0.3)
  body extent -5.18,-2.9 5.28,2.35, height 12.5

## Part data
C1A C1B C2A C2B: "CAP 0402 18pF 50V (NP0 Dielectric)", WVDC=50
C3A C21A C21B: "CAP 0402 10nF 25V", WVDC=25
C3B C41A: "CAP 0402 100nF 10V", WVDC=25
C4A C4B C5A C5B C6A C6B C7A C7B C8A C8B C9A C9B C10A C10B C11A C11B C18A C18B C22A C22B C23A C23B C30A C30B C34A C34B C38A C38B: "CAP 0402 2.2uF 16V", WVDC=16
C12A C12B C13A C13B C14A C14B C15A C15B C17A C17B: "CAP 0402 2.2nF 100V (X7R DIELECTRIC)", WVDC=100
C19A C19B: "CAP 0603 47nF 100V (X7R DIELECTRIC)", WVDC=100
C20A C20B: "CAP 1206 1uF 100V", WVDC=100
C33A C33B C40A: "CAP 1206 10uF 25V", WVDC=25
C35A C36A C37A: "CAP 1206 4.7uF 100V", WVDC=100
C39: "CAP 7.5mm Radial 1000uF 100V", WVDC=100
D1A D1B: "RED LED"
D3A D3B: "Schottky Diodes & Rectifiers 100V", If=200mA, Vrrm=100
J10 J11 J12: "2.54mm Header 14 Pin 1 Row"
JAA JAB JBA JBB JCA JCB: "SPADE CONNECTOR BOARD MOUNT"
JB: "XT30 SOCKET"
L1: "Fixed Inductors 1008 4.7uH 20% 1.1A"
L1A L1B: "Fixed Inductors 330uH 10% SMD 0805 AEC-Q200", Isat=400mA
Q1A Q1B Q2A Q2B Q3A Q3B Q4A Q4B Q5A Q5B Q6A Q6B: "100V 100A VSONP-8 5.3mOhm Pwr MOSFET", Manufacturer="Texas Instruments", Value2="48 nC", ComponentLink1Description="Datasheet link", IdsMax_A=100A, PartNumber=CSD19531Q5A, QgTyp_nC=48, RoHS=Y, SizeArea_mm2=30, SizeAreaWB_mm2=56, SizeX_mm=6, SizeY_mm=5, SizeZ_mm=1, VdsMax_V=100V, Vgs_V=100V
Q7A Q7B: "MOSFET 60V 200mW"
R1A R1B R2A R2B R3A R3B R4A R4B R5A R5B R6A R6B: "RES 0402 4.7R 5%"
R5 R7A R7B R8A R8B R9A R9B R19A R19B R21A R21B R23A R23B R38A R38B: "RES 0402 39k 1%"
R6 R11 R12 R13A R13B R14A R14B R15A R15B R20A R20B R22A R22B R24A R24B R39A R39B R40A R40B: "RES 0402 2.2k 1%"
R10: "NTC THERMISTOR 0402 2k 2%"
R10A R10B R12A R12B: "RES 2726 1mOhm 1%"
R13 R16A R16B R17A R17B R18A R18B R34A R34B R41A: "RES 0402 10k 1%"
R25A R25B R26A R26B R29A R29B R30A R30B R32A R32B: "RES 0402 100R 1%"
R33A R33B: "RES 0402 31.6k 1%"
R35A R35B: "RES 0402 274k 1%"
R36A R36B: "RES 0402 133k 1%"
R37A R37B: "RES 0402 47k 1%"
R42A: "RES 0402 3.65k 1%"
U1: "4.5V to 17V Input, 1A Synchronous Step-Down Voltage Regulator in 6-pin SOT-23"
U1A U1B: "Cortex M4 MCU"
U3A U3B: "100V Three Phase Gate Driver With 3 Current Shunt Amplifiers and Buck Regulator"
Y1A Y1B: "Ceramic Resonator 8.0000MHz 33pf 0.5%"

## Free pads (board coordinates)
  round 7 hole 5.5: 2(92.1,146.7) 2(121.9,40.9) 2(151.8,146.6)
  rect 1.4x1.8 smd: 3(126.8,60.7) 3(128.6,60.7)

## Via types
v1: diameter 0.52, hole 0.254, Component Side to Bottom Layer, tented both sides, 284 vias
v2: diameter 1, hole 0.5, Component Side to Bottom Layer, tented both sides, 283 vias

## Nets (pads, with @x,y where several pads share a name; then routed paths per layer and width w, separated by ;. In a path a pad name is that pad's centre, name@x,y a point inside that pad or via, vN(x,y) a via of type N, cw(c..) or ccw(c..) an arc to the next point about the centre after c; other vN are vias at no path point)
BOOT0: J10.2 R13.2 U1A.60 U1B.60 | length 64.9
  Component Side w0.2: U1B.60@131.86,67.2 133.5,67.2 v1(134,67.7) v1@134.1,67.7 ; U1A.60@131.86,103.2 133.1,103.2 133.3,103 v1(133.3,102.7) ; R13.2@146.2,66.008 v1@146.992,66.008 ; v1@146.9,65.9 v1(147,66) 147,65.3 147.3,65 152,65 152.85,64.15 152.95,64.15 J10.2@153.6,63.5
  Bottom Layer w0.2: v1(133.3,102.7) 133.3,102.4 133.1,102.2 133.1,99.2 132.5,98.6 132.5,89.9 133,89.4 133,79.6 132.6,79.2 132.6,74.7 134.2,73.1 134.2,71.4 133.4,70.6 133.4,69.35 134.525,68.225 ; v1(147,66) 146.8,65.8 136.95,65.8 134.525,68.225 ; 134.525,68.225 v1(134,67.7) 134.525,68.225
BUSFET: U1A.59 | length 68.7
  Component Side w0.2: 100.75,132.675 100.75,135.95 101.1,136.3 101.9,136.3 102.2,136 102.9,136 v1(103.1,136.2) ; v1(129.5,104.3) 130.1,103.7 U1A.59@131.86,103.7
  Bottom Layer w0.2: v1(103.1,136.2) 103.6,136.7 128.5,136.7 129.3,135.9 129.3,132.4 127.9,131 127.9,110.9 129.6,109.2 129.6,105.9 130.1,105.4 130.1,104.9 v1(129.5,104.3)
CAN_RX: U1A.61 U1B.61 | length 41.6
  Component Side w0.2: v1(130.055,67.9) 130.055,67.445 130.8,66.7 U1B.61@131.86,66.7 ; v1@130.4,103 130.7,102.7 U1A.61@131.86,102.7
  Bottom Layer w0.2: v1@130.2,68 129.955,68 129.5,68.455 129.5,73.1 131,74.6 131,80 131.4,80.4 131.4,88.6 130.9,89.1 130.9,98 130.2,98.7 130.2,101.5 129.7,102 129.7,102.6 130.1,103 v1(130.5,103)
CAN_TX: U1A.62 U1B.62 | length 41.2
  Component Side w0.2: v1@130,66.6 130.2,66.6 130.6,66.2 U1B.62@131.86,66.2 ; v1@130.4,102.2 U1A.62@131.86,102.2
  Bottom Layer w0.2: v1(130.055,66.6) 130.7,67.245 130.7,68.2 129.9,69 129.9,72.9 131.4,74.4 131.4,79.8 131.8,80.2 131.8,88.8 131.3,89.3 131.3,98.2 130.6,98.9 130.6,102 v1(130.3,102.3)
CHARGEPUMP: U1A.58 | length 47.3
  Component Side w0.2: 117.5,135.275 117.6,135.375 v1(117.6,136) ; v1(129.5,105.1) 129.6,105.1 130.5,104.2 U1A.58@131.86,104.2
  Bottom Layer w0.2: v1@117.5,136 117.8,136.3 128.3,136.3 128.9,135.7 128.9,132.6 127.5,131.2 127.5,110.7 129.2,109 129.2,105.4 v1(129.5,105.1)
DISABLE_GATES: J10.11 Q7A.1 Q7B.1 R12.2 | length 16.7
  Component Side w0.2: Q7A.1@145.725,96.55 150.65,96.55 v1(150.7,96.6) 150.7,97.242 R12.2@150.8,97.342
  Bottom Layer w0.2: v1(150.7,96.6) 151.3,96 151.3,88.76 J10.11@153.3,86.76